# EAGLE board SRAM_DASHBOARD (EAGLE 9.1.3)
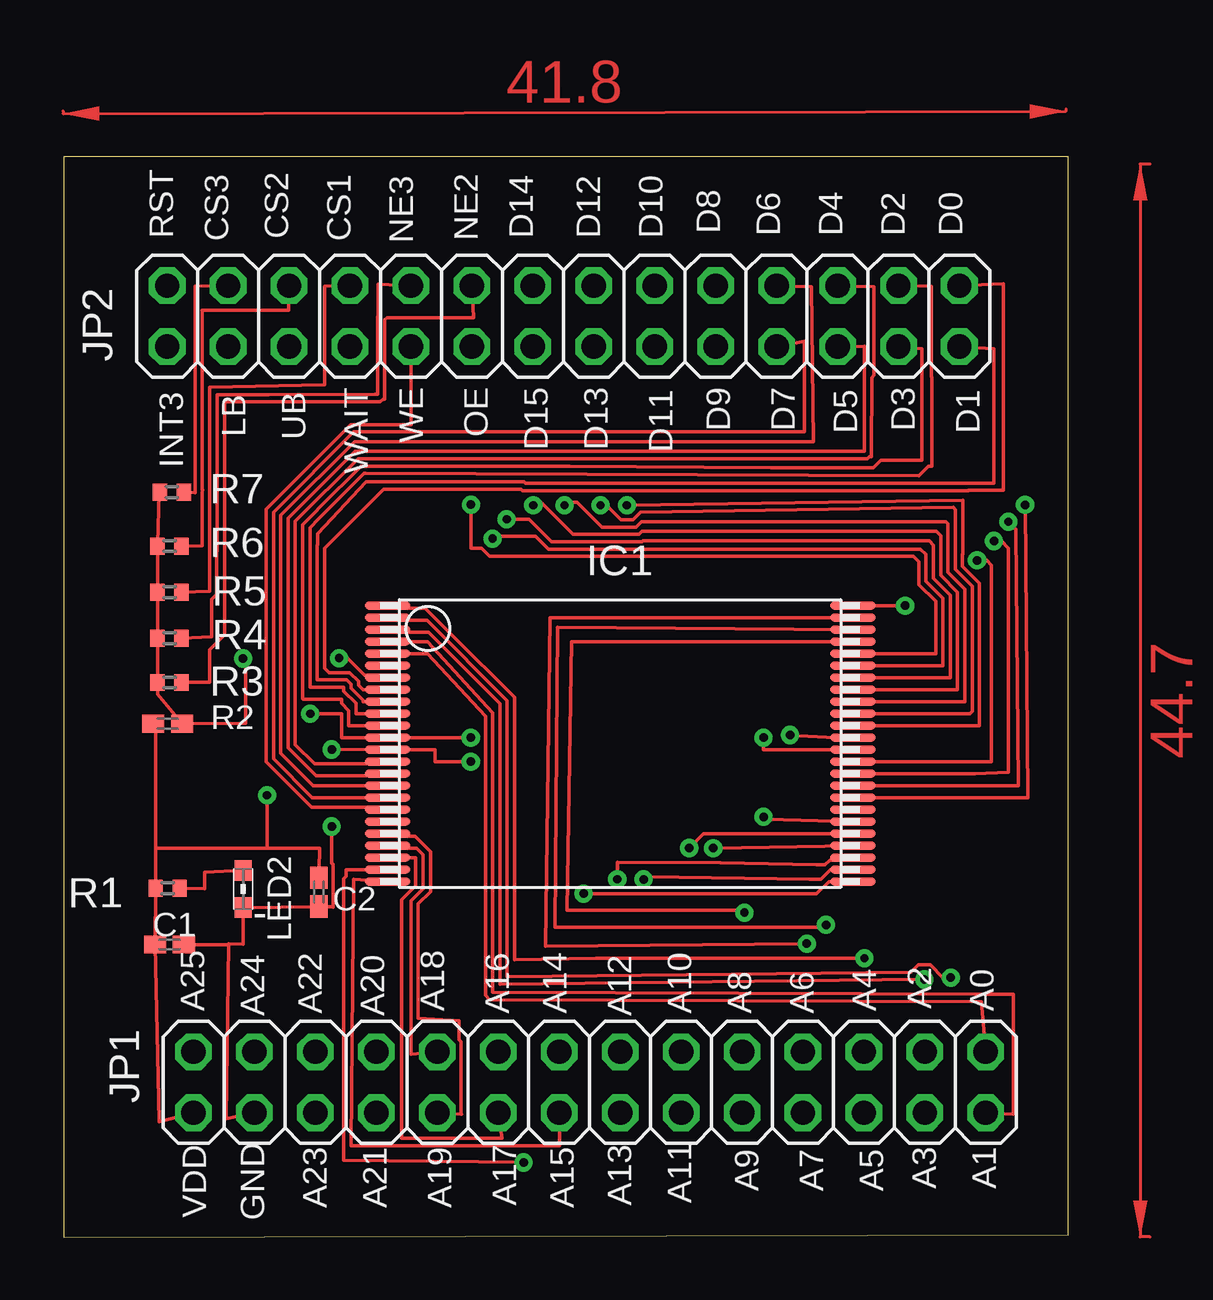
[diagram p0: board, top side]
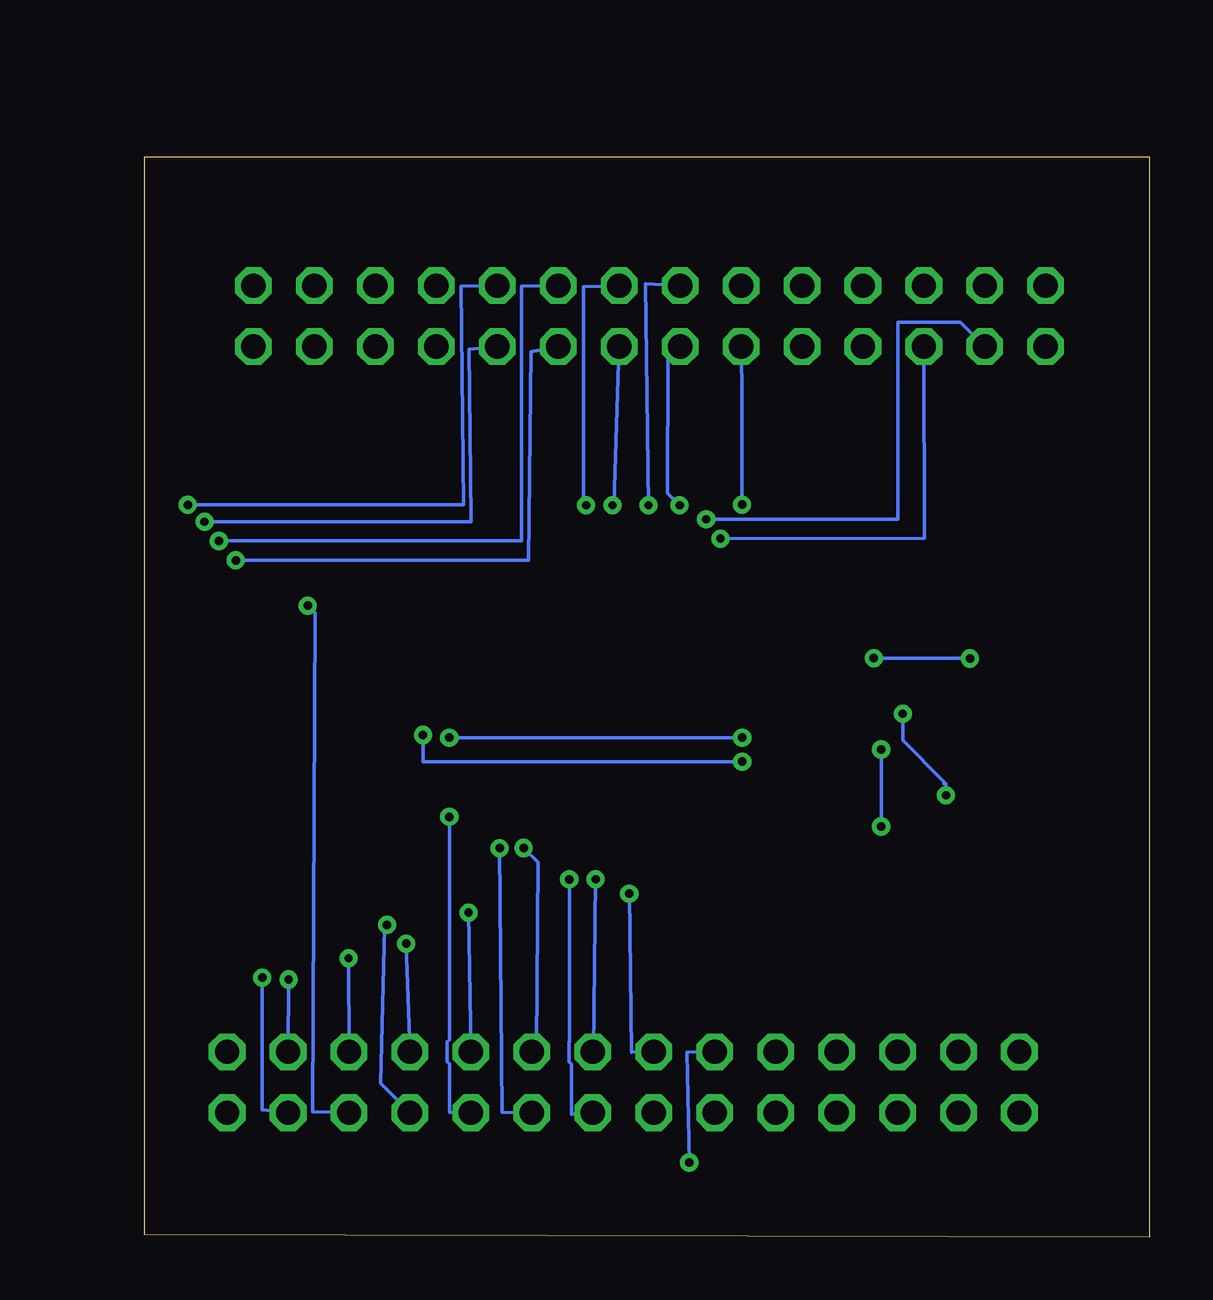
[diagram p1: board, bottom side, seen from below]

Size 41.88 x 45.01 mm. Coordinates in mm from the lower left corner, seen from the top.
Outline: 0,0 41.88,0.1 41.88,45.01 0,45.01 0,0
Copper layers (1*16): Top 0.035mm / dielectric 1.5mm / Bottom 0.035mm
Design rules "default": minimum track width 6mil, minimum drill 0.35mm, track to track 6mil, track to pad 6mil, pad to pad 6mil, via to via 6mil, smd to smd 6mil, copper to edge 40mil, drill to drill 6mil, minimum pad ring 10mil, minimum via ring 8mil, stop-mask expansion 4mil, vias tented up to drill 0mil, thermal gap 10mil

## Footprints (pad centres in the part's own frame; a part is rotated, then mirrored left to right if it is on the bottom)
C0402K = smd 0.925 x 0.74: 1 -0.6,0; 2 0.6,0
TSOP-I-48-12X40MM = smd 1.9 x 0.34: 1 -9.7,5.75; 2 -9.7,5.25; 3 -9.7,4.75; 4 -9.7,4.25; 5 -9.7,3.75; 6 -9.7,3.25; 7 -9.7,2.75; 8 -9.7,2.25; 9 -9.7,1.75; 10 -9.7,1.25; 11 -9.7,0.75; 12 -9.7,0.25; 13 -9.7,-0.25; 14 -9.7,-0.75; 15 -9.7,-1.25; 16 -9.7,-1.75; 17 -9.7,-2.25; 18 -9.7,-2.75; 19 -9.7,-3.25; 20 -9.7,-3.75; 21 -9.7,-4.25; 22 -9.7,-4.75; 23 -9.7,-5.25; 24 -9.7,-5.75; 25 9.7,-5.75; 26 9.7,-5.25; 27 9.7,-4.75; 28 9.7,-4.25; 29 9.7,-3.75; 30 9.7,-3.25; 31 9.7,-2.75; 32 9.7,-2.25; 33 9.7,-1.75; 34 9.7,-1.25; 35 9.7,-0.75; 36 9.7,-0.25; 37 9.7,0.25; 38 9.7,0.75; 39 9.7,1.25; 40 9.7,1.75; 41 9.7,2.25; 42 9.7,2.75; 43 9.7,3.25; 44 9.7,3.75; 45 9.7,4.25; 46 9.7,4.75; 47 9.7,5.25; 48 9.7,5.75
2X14 = drill 1.016 octagon: 1 -16.51,-1.27; 2 -16.51,1.27; 3 -13.97,-1.27; 4 -13.97,1.27; 5 -11.43,-1.27; 6 -11.43,1.27; 7 -8.89,-1.27; 8 -8.89,1.27; 9 -6.35,-1.27; 10 -6.35,1.27; 11 -3.81,-1.27; 12 -3.81,1.27; 13 -1.27,-1.27; 14 -1.27,1.27; 15 1.27,-1.27; 16 1.27,1.27; 17 3.81,-1.27; 18 3.81,1.27; 19 6.35,-1.27; 20 6.35,1.27; 21 8.89,-1.27; 22 8.89,1.27; 23 11.43,-1.27; 24 11.43,1.27; 25 13.97,-1.27; 26 13.97,1.27; 27 16.51,-1.27; 28 16.51,1.27
0603_AK = smd 0.85 x 0.7: A -0.775,0; K 0.775,0
R0402 = smd 0.6 x 0.7: 1 -0.5,0; 2 0.5,0

## Placement (x,y rotation side)
C1  10nF  [C0402K]  4.42,12.19 0 top
C2  100nF  [C0402K]  10.64,14.37 270 top
IC1  IS64WV102416BLL-10CT  [TSOP-I-48-12X40MM]  23.2,20.56 0 top
JP1  [2X14]  21.93,6.45 0 top
JP2  [2X14]  20.83,38.37 0 top
LED2  LED  [0603_AK]  7.48,14.5 270 top
R1  470  [R0402]  4.34,14.53 180 top
R2  10k  [C0402K]  4.34,21.39 180 top
R3  0  [R0402]  4.42,23.11 0 top
R4  0  [R0402]  4.42,24.95 0 top
R5  0  [R0402]  4.42,26.87 0 top
R6  0  [R0402]  4.42,28.79 0 top
R7  0  [R0402]  4.52,31.03 0 top

## Library data of the parts
C1 C2 = rcl; SPICEPREFIX: C
IC1 = memory-issi-asynsram
JP1 JP2 = pinhead
LED2 = sicom_universal; MPN: LB Q39G-L2OO-35-1
R1 R3-R7 = rcl; SPICEPREFIX: R
R2 = sicom_universal

## Nets
A0: IC1.5 JP1.28
A1: IC1.4 JP1.27
A2: IC1.3 JP1.26
A3: IC1.2 JP1.25
A4: IC1.1 JP1.24
A5: IC1.48 JP1.23
A6: IC1.47 JP1.22
A7: IC1.46 JP1.21
A8: IC1.45 JP1.20
A9: IC1.30 JP1.19
A10: IC1.29 JP1.18
A11: IC1.28 JP1.17
A12: IC1.27 JP1.16
A13: IC1.26 JP1.15
A14: IC1.25 JP1.14
A15: IC1.24 JP1.13
A16: IC1.23 JP1.12
A17: IC1.22 JP1.11
A18: IC1.21 JP1.10
A19: IC1.20 JP1.9
A20: JP1.8
A21: JP1.7
A22: JP1.6
A23: JP1.5
A24: JP1.4
A25: JP1.2
CE: IC1.7 R2.1 R3.1 R4.1 R5.1 R6.1 R7.1
CS1: JP2.8 R5.2
CS2: JP2.6 R6.2
CS3: JP2.4 R7.2
D0: IC1.8 JP2.28
D1: IC1.9 JP2.27
D2: IC1.10 JP2.26
D3: IC1.11 JP2.25
D4: IC1.14 JP2.24
D5: IC1.15 JP2.23
D6: IC1.16 JP2.22
D7: IC1.17 JP2.21
D8: IC1.32 JP2.20
D9: IC1.33 JP2.19
D10: IC1.34 JP2.18
D11: IC1.35 JP2.17
D12: IC1.38 JP2.16
D13: IC1.39 JP2.15
D14: IC1.40 JP2.14
D15: IC1.41 JP2.13
GND: C1.2 C2.2 IC1.13 IC1.37 JP1.3 LED2.K
INT3: JP2.1
LB: IC1.42 JP2.3
N$1: LED2.A R1.1
NE2: JP2.12 R3.2
NE3: JP2.10 R4.2
OE: IC1.44 JP2.11
RESET: JP2.2
UB: IC1.43 JP2.5
VDD: C1.1 C2.1 IC1.12 IC1.36 JP1.1 R1.2 R2.2
WAIT: JP2.7
WE: IC1.18 JP2.9

## Tracks (layer width: path | path; a pad name or v marks a point on that pad's centre or on a via)
A0
  Top 0.152: IC1.5 15.18,24.31 17.58,21.71 | 17.58,21.71 | 17.58,21.71 17.58,10.08 17.76,9.9 17.88,9.9 38.26,9.81 JP1.28
A1
  Top 0.152: IC1.4 15.18,24.81 17.89,21.84 17.89,10.2 38.38,10.11 38.5,10.12 38.5,10.11 39.58,10.11 39.58,5.11 JP1.27
A2  (via drill 0.35)
  Top 0.152: IC1.3 13.6,25.21 15.21,25.21 18.19,22.23 18.19,10.54 v35.88,10.73
  Bottom 0.152: v35.88,10.73 JP1.26
A3  (via drill 0.35)
  Top 0.152: IC1.2 13.6,25.71 15.14,25.71 18.5,22.36 18.5,10.85 35.32,11.03 35.63,11.34 36.13,11.34 36.66,10.81 v36.98,10.81
  Bottom 0.152: v36.98,10.81 36.98,5.31 JP1.25
A4  (via drill 0.35)
  Top 0.152: IC1.1 13.6,26.21 15.07,26.21 16.18,25.11 18.8,22.48 18.8,11.56 22.2,11.62 v33.38,11.62
  Bottom 0.152: v33.38,11.62 JP1.24
A5  (via drill 0.35)
  Top 0.152: IC1.48 v35.08,26.31
  Bottom 0.152: JP1.23 34.88,5.22 34.78,26.01 v35.08,26.31
A6  (via drill 0.35)
  Top 0.152: IC1.47 20.28,25.81 20.08,12.11 v30.98,12.22
  Bottom 0.152: v30.98,12.22 JP1.22
A7  (via drill 0.35)
  Top 0.152: IC1.46 20.58,25.41 20.48,12.91 31.68,12.91 v31.78,13.01
  Bottom 0.152: JP1.21 32.05,6.41 31.89,12.9 v31.78,13.01
A8  (via drill 0.35)
  Top 0.152: IC1.45 21.18,24.81 20.98,13.61 28.28,13.62 v28.38,13.52
  Bottom 0.152: v28.38,13.52 JP1.20
A9  (via drill 0.35)
  Top 0.152: IC1.30 29.28,17.41 v29.18,17.51
  Bottom 0.152: JP1.19 29.18,5.21 29.18,7.22 29.27,7.31 29.27,8.13 29.18,8.22 v29.18,17.51
A10  (via drill 0.35)
  Top 0.152: IC1.29 26.68,16.81 v26.08,16.21
  Bottom 0.152: v26.08,16.21 25.49,15.62 25.54,7.92 JP1.18
A11  (via drill 0.35)
  Top 0.152: IC1.28 v27.08,16.2
  Bottom 0.152: v27.08,16.2 26.98,5.21 JP1.17
A12  (via drill 0.35)
  Top 0.152: 32.8,15.71 IC1.27 32.8,15.71 | 32.8,15.71 31.94,15.71 31.74,15.51 31.38,15.51 27.38,15.59 23.08,15.61 v23.08,14.91
  Bottom 0.152: v23.08,14.91 23.18,7.74 JP1.16
A13  (via drill 0.35)
  Top 0.152: IC1.26 32.8,15.31 31.97,15.31 31.57,14.91 31.08,14.91 24.29,15.01 v24.18,14.9
  Bottom 0.152: v24.18,14.9 24.18,8.14 24.19,8.13 24.19,7.31 24.08,7.2 24.08,5.11 JP1.15
A14  (via drill 0.35)
  Top 0.152: IC1.25 31.9,14.81 31.39,14.3 21.79,14.3 21.78,14.31 v21.68,14.31
  Bottom 0.152: v21.68,14.31 21.58,7.71 JP1.14
A15
  Top 0.152: IC1.24 12.08,14.91 11.98,3.81 20.68,3.81 JP1.13
A16  (via drill 0.35)
  Top 0.152: IC1.23 11.78,15.31 11.78,15.04 11.67,14.94 11.67,3.69 11.68,3.68 11.68,3.21 v19.18,3.11
  Bottom 0.152: v19.18,3.11 19.28,7.71 JP1.12
A17
  Top 0.152: IC1.22 14.68,15.81 14.68,14.64 14.08,14.05 14.08,4.12 | 14.08,4.12 | 14.08,4.12 18.28,4.12 JP1.11
A18
  Top 0.152: IC1.21 13.6,16.21 14.71,16.21 14.98,15.94 14.98,14.52 14.48,14.02 14.48,7.61 JP1.10
A19
  Top 0.152: IC1.20 13.6,16.71 14.64,16.71 15.29,16.06 15.29,14.39 14.79,13.89 14.79,9.11 16.48,9.01 16.48,8.22 16.57,8.13 16.57,5.12 16.58,5.11 JP1.9
CE  (via drill 0.35)
  Top 0.152: R7.1 3.98,30.99 3.92,28.91 3.92,28.81 R6.1 R5.1 R4.1 3.92,24.01 3.92,23.71 | 3.92,23.71 R3.1 3.92,22.62 R2.1 7.58,21.41 7.58,24.01 v7.48,24.11 | 3.92,23.71 | IC1.7 13.4,23.41 12.55,23.41 11.84,24.12 v11.49,24.12
  Bottom 0.152: v11.49,24.12 v7.48,24.11
CS1
  Top 0.152: R5.2 6.08,26.91 6.08,28.68 6.08,28.69 6.09,28.69 6.08,28.81 6.08,30.75 6.1,30.77 6.1,31.25 6.09,31.26 6.09,35.41 10.88,35.51 10.88,39.61 JP2.8
CS2
  Top 0.152: R6.2 5.78,28.81 5.78,30.88 5.79,30.89 5.79,31.01 5.79,31.13 5.79,31.14 5.79,38.61 9.38,38.61 JP2.6
CS3
  Top 0.152: R7.2 5.48,31.02 5.48,39.61 JP2.4
D0
  Top 0.152: JP2.28 39.18,39.71 39.18,31.11 37.72,31.11 37.71,31.1 36.91,31.1 36.43,31.1 36.39,31.1 19.13,31.1 19.07,31.16 13.33,31.16 10.88,28.71 10.88,23.71 11.07,23.52 11.93,23.52 12.29,23.16 12.29,23 12.48,22.81 IC1.8
D1
  Top 0.152: JP2.27 38.78,37 38.78,31.41 37.59,31.41 36.18,31.41 19.26,31.41 19.19,31.48 12.62,31.48 10.58,29.31 10.58,28.84 10.57,28.84 10.57,23.21 11.81,23.21 11.98,23.03 11.98,22.87 12.49,22.37 12.49,22.31 IC1.9
D2
  Top 0.152: JP2.26 36.18,39.61 36.18,35.84 36.19,35.84 36.19,35.82 36.2,35.81 36.2,32.11 36.04,32.11 35.64,31.71 12.58,31.82 12.53,31.82 10.63,29.92 10.27,29.56 10.27,22.91 10.44,22.91 10.45,22.91 11.68,22.91 11.68,22.74 12.19,22.23 12.19,21.81 | 12.19,21.81 | 12.19,21.81 12.8,21.81 IC1.10
D3
  Top 0.152: 10.5,30.23 9.96,29.69 9.96,22.43 9.98,22.41 11.58,22.41 11.58,22.24 11.88,21.94 11.88,21.81 11.88,21.69 11.88,21.68 11.88,21.31 IC1.11 | 10.5,30.23 | JP2.25 35.78,37.01 35.78,32.37 34.07,32.37 33.75,32.05 29.48,32.05 21.09,32.13 12.4,32.13 10.68,30.41 10.68,30.4 10.5,30.23 | 10.5,30.23
D4
  Top 0.152: JP2.24 33.78,39.61 33.78,35.91 33.69,35.81 33.69,35.69 33.68,32.74 33.68,32.61 33.68,32.51 33.58,32.51 33.5,32.43 12.28,32.43 9.66,29.82 9.66,20.51 10.45,19.71 13.4,19.71 IC1.14
D5
  Top 0.152: JP2.23 33.38,37.11 33.38,32.74 12.15,32.74 9.36,29.94 9.36,20.38 10.52,19.21 13.4,19.21 IC1.15
D6
  Top 0.152: IC1.16 10.39,18.81 9.05,20.15 9.05,30.07 12.12,33.14 31.26,33.14 31.17,39.61 JP2.22
D7
  Top 0.152: IC1.17 10.36,18.31 8.75,19.93 8.75,30.19 12.1,33.55 30.88,33.55 30.88,37.33 JP2.21
D8  (via drill 0.35)
  Top 0.152: IC1.32 40.19,18.31 v40.08,30.51
  Bottom 0.152: JP2.20 28.7,39.61 28.59,30.51 v40.08,30.51
D9  (via drill 0.35)
  Top 0.152: IC1.33 39.79,18.81 39.69,29.5 v39.38,29.8
  Bottom 0.152: v39.38,29.8 28.27,29.81 28.27,29.94 28.28,29.94 28.36,37 JP2.19
D10  (via drill 0.35)
  Top 0.152: IC1.34 37.98,19.31 39.38,19.36 39.38,28.71 39.08,29.01 v38.78,29.01
  Bottom 0.152: 37.68,29.01 26.18,29.01 26.18,39.61 JP2.18 | 37.68,29.01 | v38.78,29.01 37.68,29.01
D11  (via drill 0.35)
  Top 0.152: IC1.35 38.68,19.81 38.68,28 38.48,28.2 v38.08,28.2
  Bottom 0.152: v38.08,28.2 25.87,28.21 25.77,36.9 JP2.17
D12  (via drill 0.35)
  Top 0.152: IC1.38 38.18,21.31 38.18,27.24 37.55,27.88 37.47,27.95 37.47,28.31 | 37.47,28.31 37.47,28.45 | 37.47,28.45 37.48,28.46 | 37.47,28.31 37.47,28.45 | 37.47,28.45 37.48,28.46 | 37.48,28.46 37.48,30.71 v23.48,30.49
  Bottom 0.152: JP2.16 23.58,39.61 23.58,30.59 v23.48,30.49
D13  (via drill 0.35)
  Top 0.152: IC1.39 37.78,21.81 37.88,21.91 37.88,27.11 37.17,27.82 37.17,30.31 37.08,30.4 24.04,30.2 23.73,29.89 23.23,29.89 22.62,30.49 v22.38,30.49
  Bottom 0.152: JP2.15 22.32,30.55 v22.38,30.49
D14  (via drill 0.35)
  Top 0.152: v20.88,30.49 20.88,30.61 21.4,30.61 22.43,29.58 23.86,29.58 24.09,29.81 36.78,29.81 36.86,29.73 36.86,27.7 37.57,26.99 37.57,22.31 IC1.40
  Bottom 0.152: v20.88,30.49 21,39.72 JP2.14
D15  (via drill 0.35)
  Top 0.152: v19.58,30.49 19.58,30.61 19.9,30.61 21.24,29.28 23.98,29.28 24.12,29.41 36.38,29.41 36.56,29.23 36.56,27.57 37.27,26.86 37.27,22.81 IC1.41
  Bottom 0.152: JP2.13 20.06,36.61 20.08,31 v19.58,30.49
GND  (via drill 0.35)
  Top 0.152: 6.88,12.23 6.88,12.19 C1.2 | 6.88,12.23 7.48,12.21 LED2.K C2.2 11.24,13.77 11.24,13.75 11.24,15.53 11.18,15.59 v11.18,17.11 | 6.88,12.23 6.78,4.93 JP1.3 | v16.97,19.81 15.48,19.81 15.48,20.21 15.48,20.31 IC1.13 v11.18,20.32 | v30.28,20.92 32.18,20.81 IC1.37
  Bottom 0.152: v11.18,20.32 v11.18,17.11 | v16.97,19.81 30.28,19.81 v30.28,20.92
LB  (via drill 0.35)
  Top 0.152: IC1.42 36.96,23.31 36.96,26.74 36.25,27.44 36.25,28.84 36.08,29.01 24.15,29.01 24.11,28.97 20.34,28.97 19.4,29.91 v18.47,29.91
  Bottom 0.152: v18.47,29.91 10.48,29.91 10.48,38.11 7.87,38.11 JP2.3
N$1
  Top 0.152: R1.1 5.88,14.51 5.88,15.21 LED2.A
NE2
  Top 0.152: JP2.12 17.08,38.31 13.48,38.31 13.39,38.22 13.39,34.98 13.38,34.98 13.38,34.91 13.31,34.91 13.2,34.8 8.54,34.8 8.41,34.8 6.78,34.8 6.71,34.72 6.71,25.1 6.08,24.47 6.08,23.11 R3.2
NE3
  Top 0.152: R4.2 6.18,25.01 6.18,26.57 6.38,26.78 6.38,26.79 6.39,26.79 6.38,26.91 6.38,28.55 6.4,28.57 6.4,31.38 6.39,31.38 6.39,35.1 8.54,35.1 12.98,35.11 13.08,35.11 13.08,38.34 13.1,38.36 13.1,39.21 13.11,39.71 JP2.10
OE  (via drill 0.35)
  Top 0.152: IC1.44 36.35,24.31 36.35,26.48 35.64,27.19 35.64,28.15 35.43,28.36 17.76,28.36 17.41,28.71 16.98,28.71 v16.98,30.52
  Bottom 0.152: JP2.11 16.98,35.59 v16.98,30.52
UB  (via drill 0.35)
  Top 0.152: IC1.43 36.66,23.81 36.66,26.61 35.95,27.32 35.95,28.44 35.72,28.67 20.22,28.67 19.68,29.2 17.98,29.2 v17.88,29.1
  Bottom 0.152: v17.88,29.1 9.37,29.11 JP2.5
VDD  (via drill 0.35)
  Top 0.152: R2.2 3.84,21.39 3.84,16.21 | 3.84,16.21 R1.2 C1.1 3.98,4.81 JP1.1 | 8.48,16.21 9.08,16.21 10.68,16.21 10.68,16.02 C2.1 | v8.48,18.41 8.48,16.21 | 3.84,16.21 8.48,16.21 | v10.28,21.8 11.58,21.81 11.58,20.81 IC1.12 v16.97,20.81 | v29.18,20.81 29.18,20.31 IC1.36
  Bottom 0.152: v8.48,18.41 8.48,18.89 8.56,18.89 8.56,18.98 10.28,20.71 v10.28,21.8 | v16.97,20.81 v29.18,20.81
WE
  Top 0.152: IC1.18 13.4,17.91 10.33,17.91 8.44,19.8 8.44,30.32 11.97,33.85 14.48,33.85 JP2.9
(copper drawn outside any net)
  shapes: Top area x2

## Text on the board
tPlace: D8 | RST | CS3 | CS2 | CS1 | NE3 | NE2 | D14 | D12 | D10 | D6 | D4 | D2 | D0 | INT3 | LB | UB | WAIT | WE | OE | D15 | D13 | D11 | D9 | D7 | D5 | D3 | D1 | A25 | A24 | A22 | A20 | A18 | A16 | A14 | A12 | A10 | A8 | A6 | A4 | A2 | A0 | A9 | A7 | A5 | A3 | A1 | VDD | GND | A23 | A21 | A19 | A17 | A15 | A13 | A11